# Altium PCB LR7843_2025-03-19.pcbdoc
Units mil, origin at the board's own origin, x right, y up, seen from the top; angles counter-clockwise.
Board outline 1690 x 2318.74 mil, 2 copper layers (Top Layer, Bottom Layer); 1 components, 0 nets, 5 pads, 0 vias.
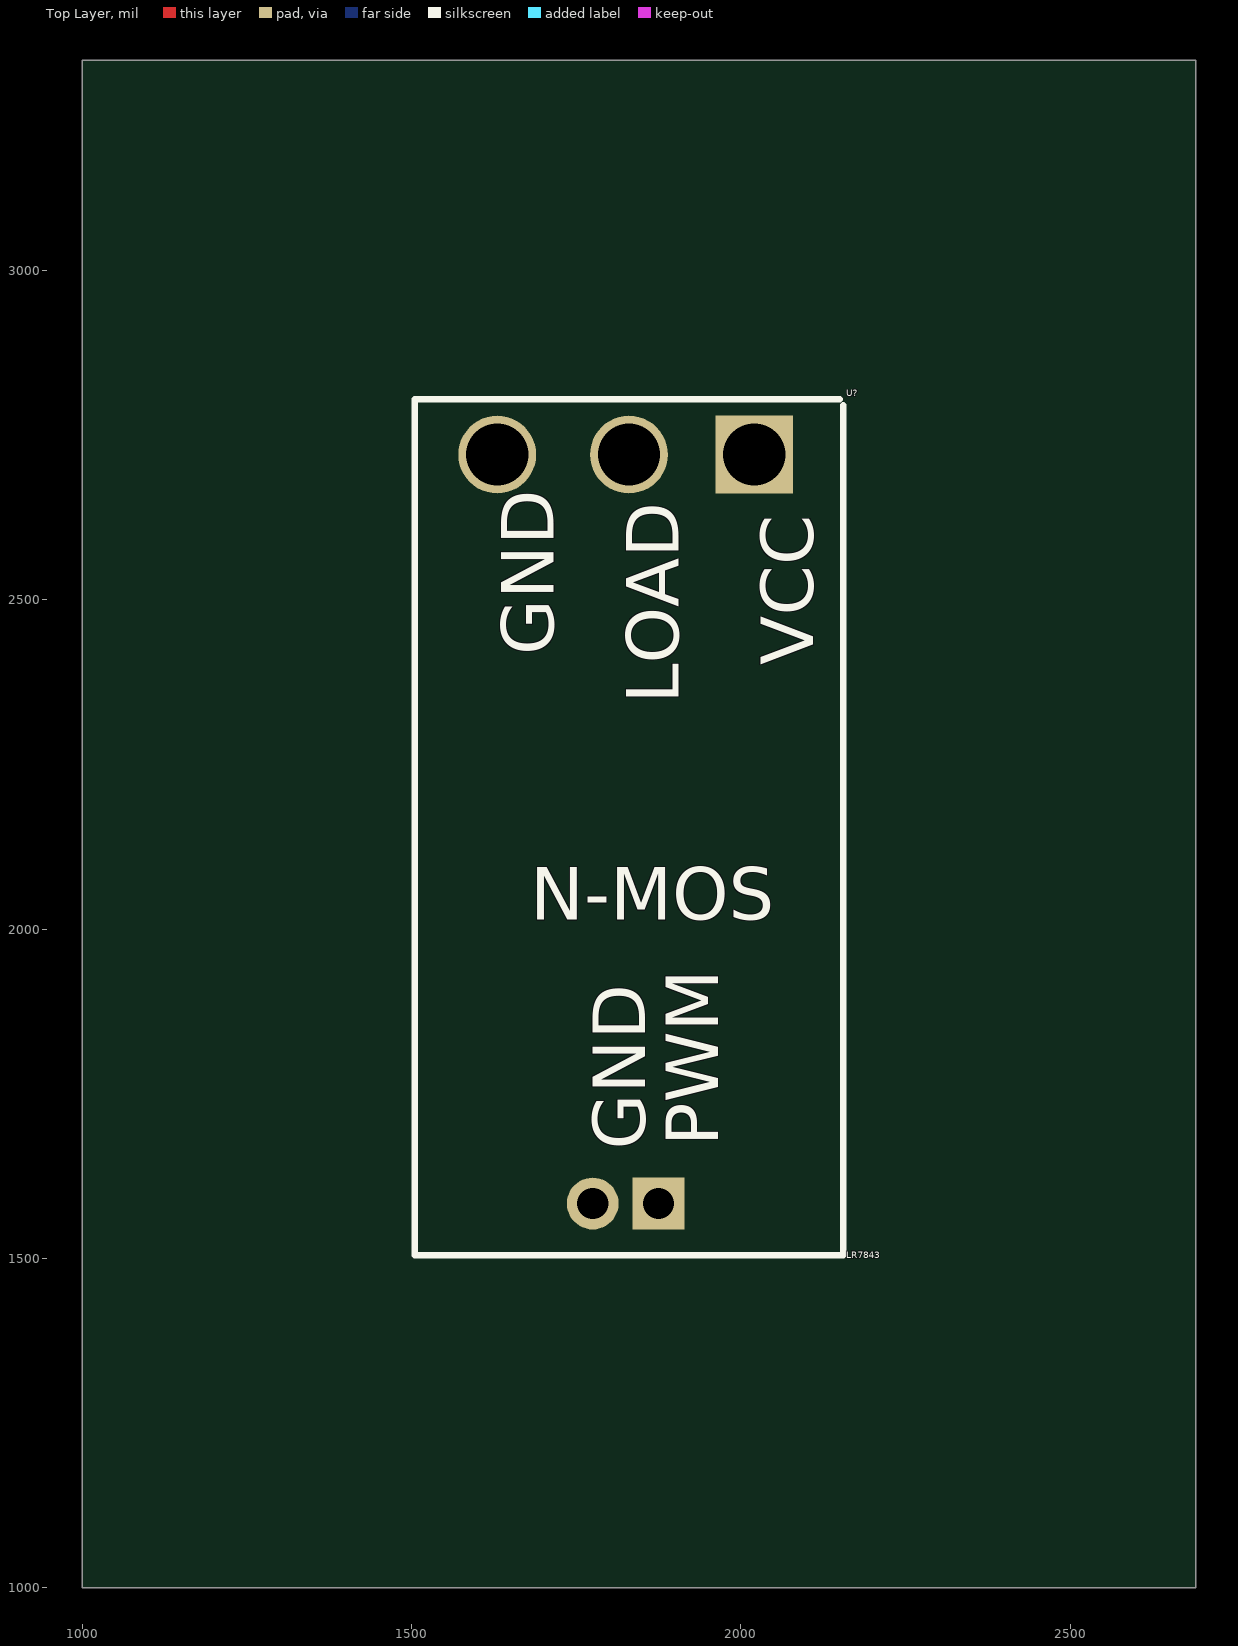
[diagram p0: Top Layer view]
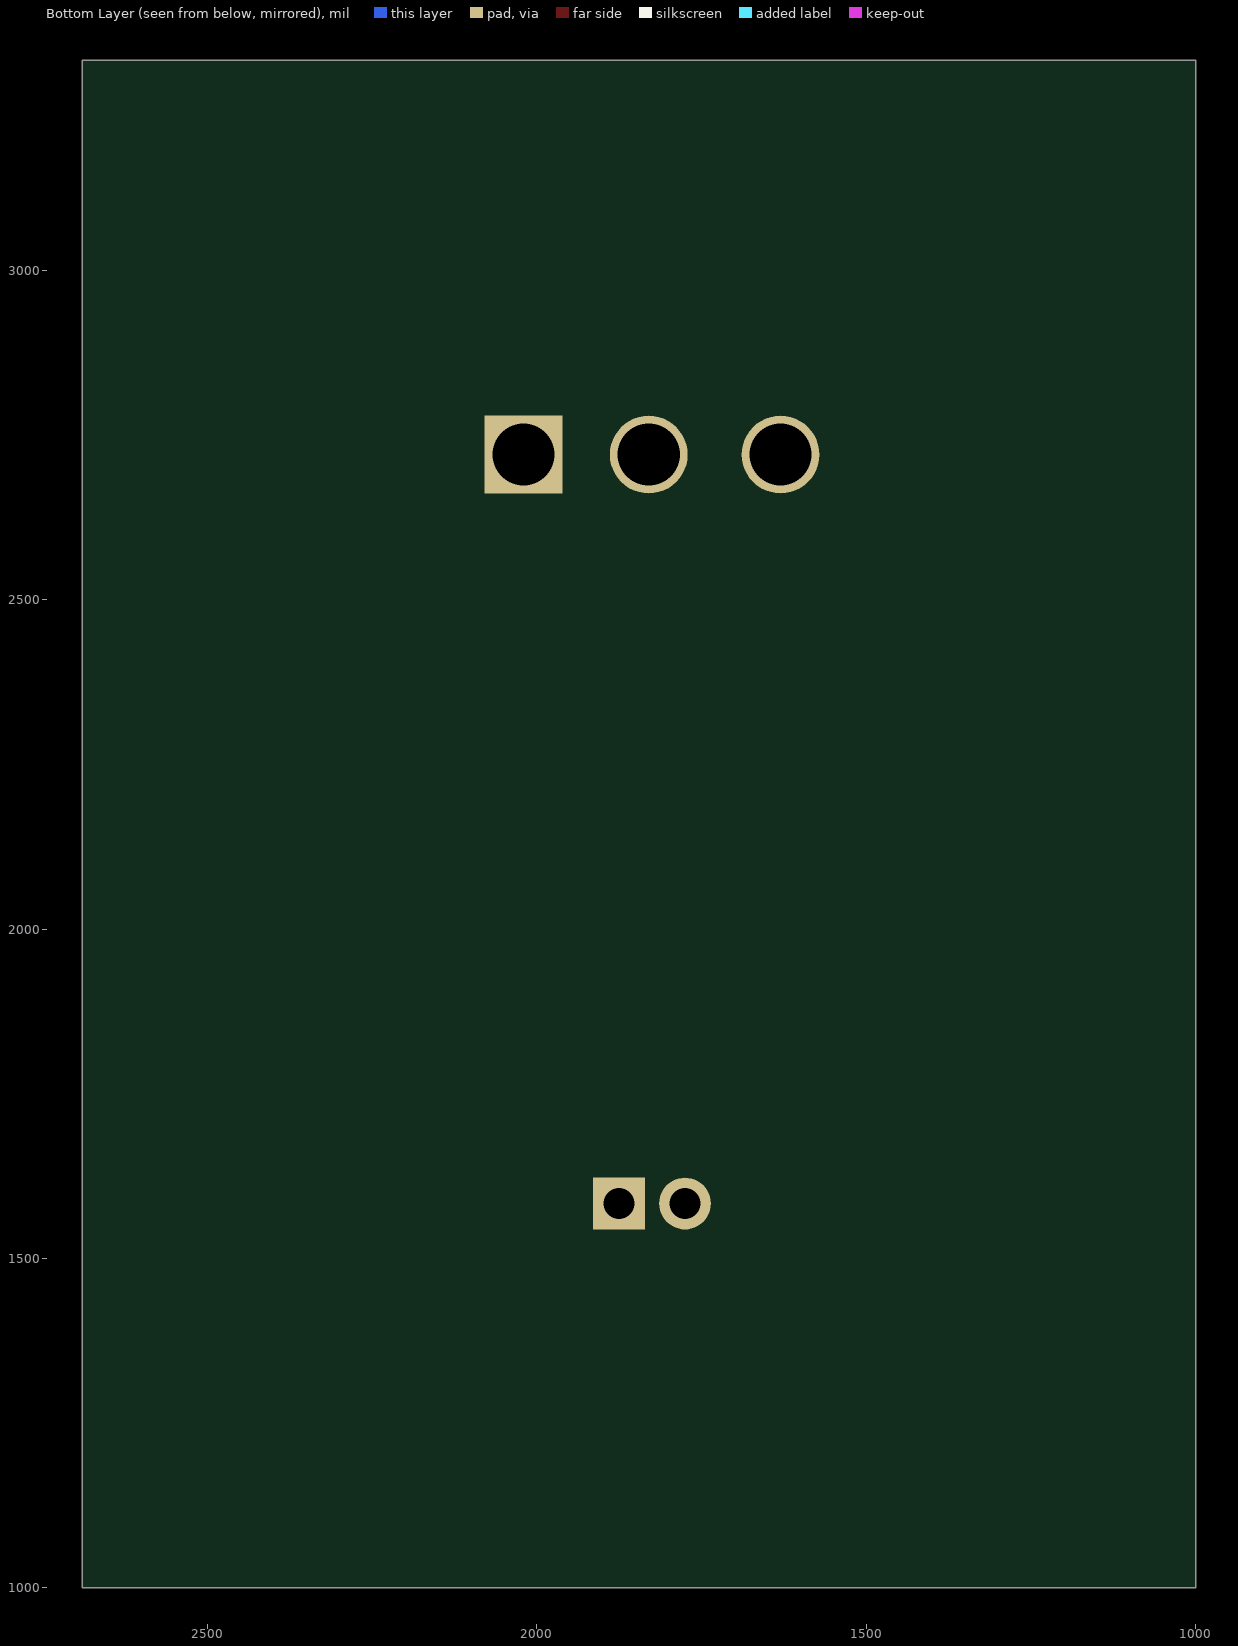
[diagram p1: Bottom Layer view, seen from below]

## Layer stack, top to bottom
Top Layer: signal copper (thickness not stored)
Dielectric: dielectric 12.6, FR-4, Dk 4.8
Bottom Layer: signal copper (thickness not stored)

## Board outline
2690,1000 1000,1000 1000,3318.74 2690,3318.74

## Components (designator, comment, footprint, x,y, rotation, side; value= is the part's Value field where it differs from the comment)
U? "LR7843" LR7843 1830,2154.37 r0 top

## Footprints (in the part's own frame and the unit in brackets; to place one, negate y for a bottom-side part, rotate by r counter-clockwise, add the part's x,y. Pads: shape width x height; smd on the part's side, far side on the other; paste and mask are expansions set on the pad)
LR7843 [mm]
  round 3 hole 2.4 paste+0 mask+0.102: 1(-5.08,14.367)
  round 3 hole 2.4 paste+0 mask+0.051: 2(0,14.367)
  rect 3x3 hole 2.4 paste+0 mask+0.102: 3(4.826,14.367)
  round 2 hole 1.2 paste+0 mask+0.051: 4(-1.397,-14.506)
  rect 2x2 hole 1.2 paste+0 mask+0.051: 5(1.143,-14.506)
  silkscreen extent -8.25,-16.49 8.25,16.49

## Nets (pads, with @x,y where several pads share a name; then routed paths per layer and width w, separated by ;. In a path a pad name is that pad's centre, name@x,y a point inside that pad or via, vN(x,y) a via of type N, cw(c..) or ccw(c..) an arc to the next point about the centre after c; other vN are vias at no path point)
pads on no net: U?.1 U?.2 U?.3 U?.4 U?.5

## Silkscreen, mask and mechanical layers (free items; w line width, h text height)
Document:
  lines w0.1: 1844.99,2159.36 1845.01,2159.38

## Text inside footprints (layer, text, board x,y; h text height)
U?: Top Overlay "VCC" at 2110,2400 h80 r90; Top Overlay "GND" at 1715.6,2415.6 h80 r90; Top Overlay "LOAD" at 1905.6,2342.1 h80 r90; Top Overlay "GND" at 1855,1665 h80 r90; Top Overlay "PWM" at 1965.6,1670.2 h80 r90; Top Overlay "N-MOS" at 1680,2014.4 h80